# Altium PCB PCB1.PcbDoc
Units mm, origin at the board's own origin, x right, y up, seen from the top; angles counter-clockwise.
Board outline 89.79 x 69.09 mm, 2 copper layers (Top Layer, Bottom Layer); 48 components, 35 nets, 197 pads, 60 vias.
Unrouted connection lines stored in the file: 4.
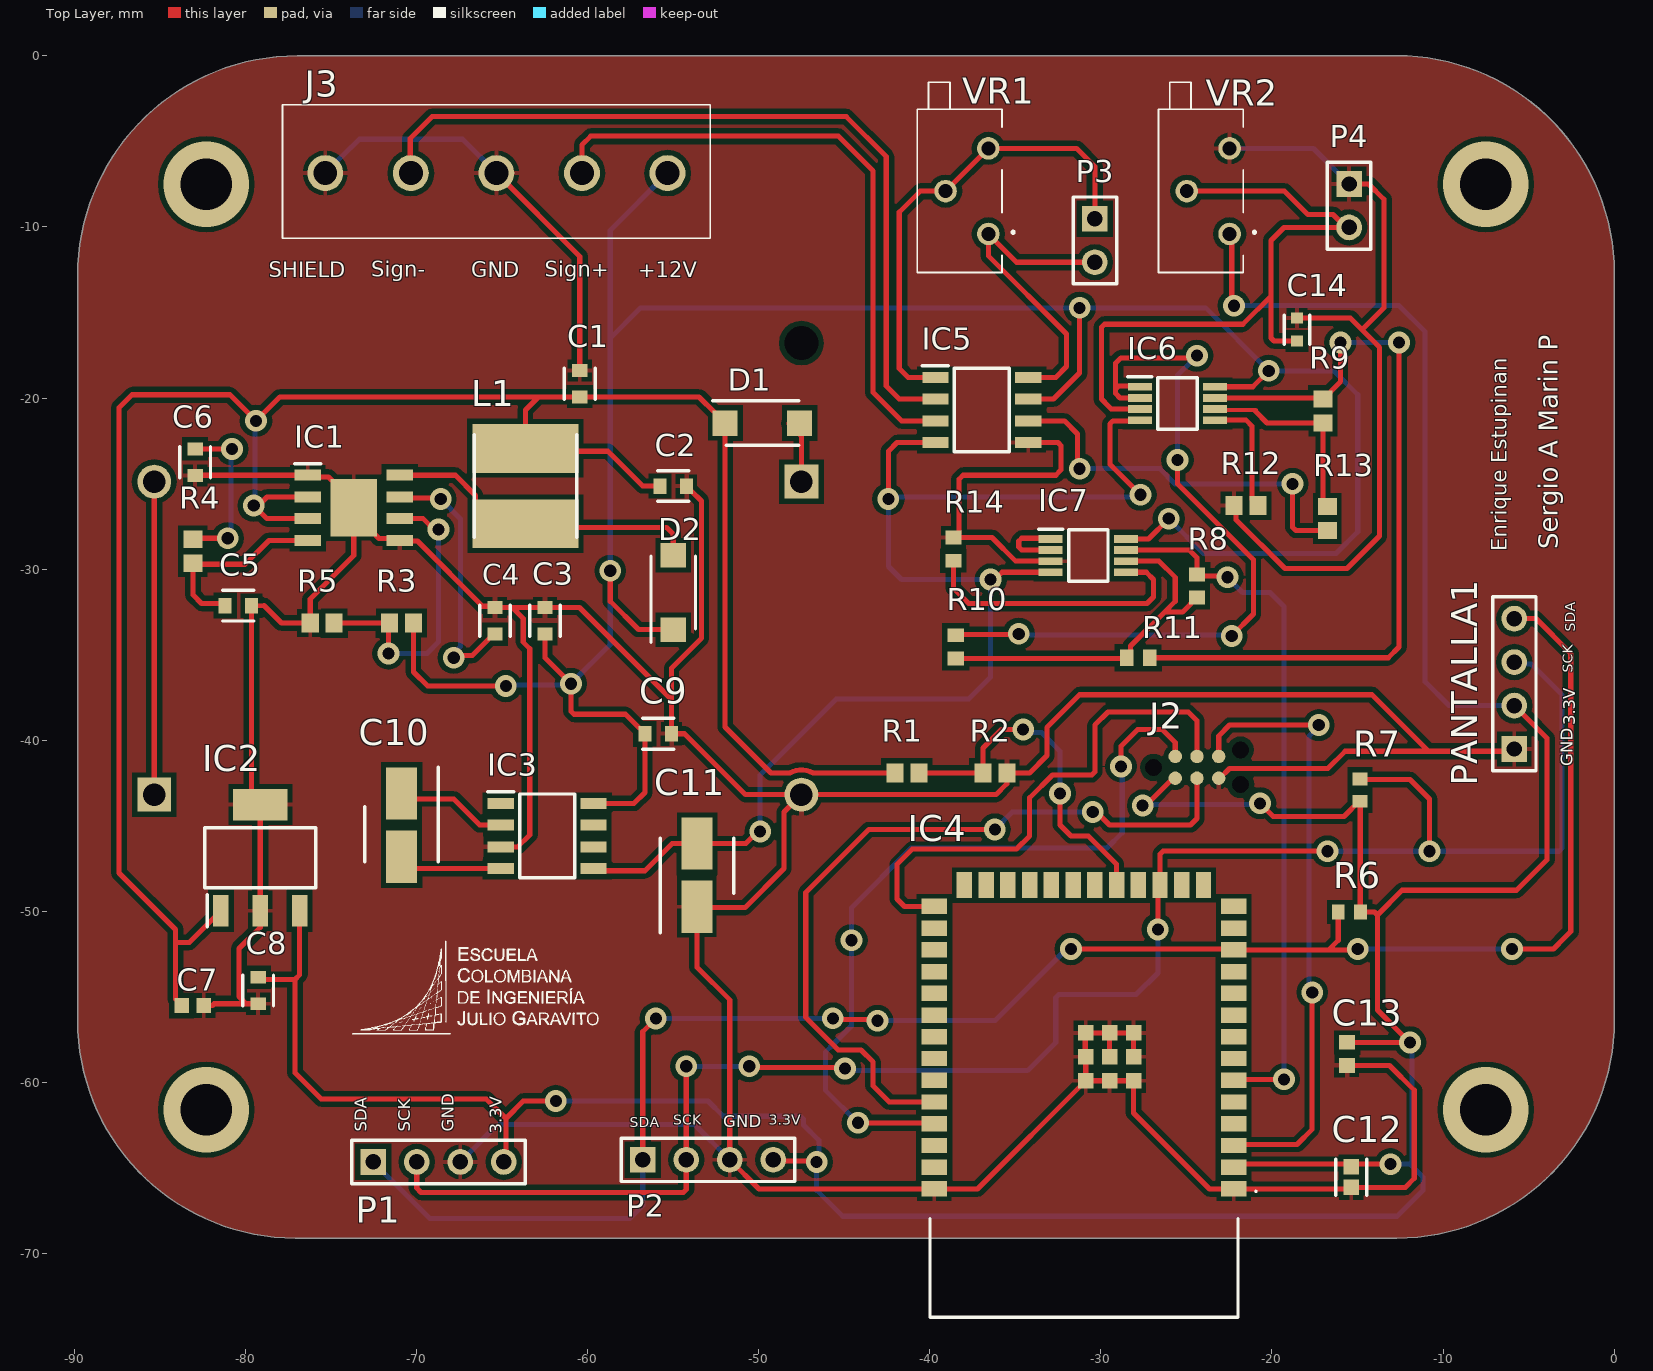
[diagram p0: Top Layer view]
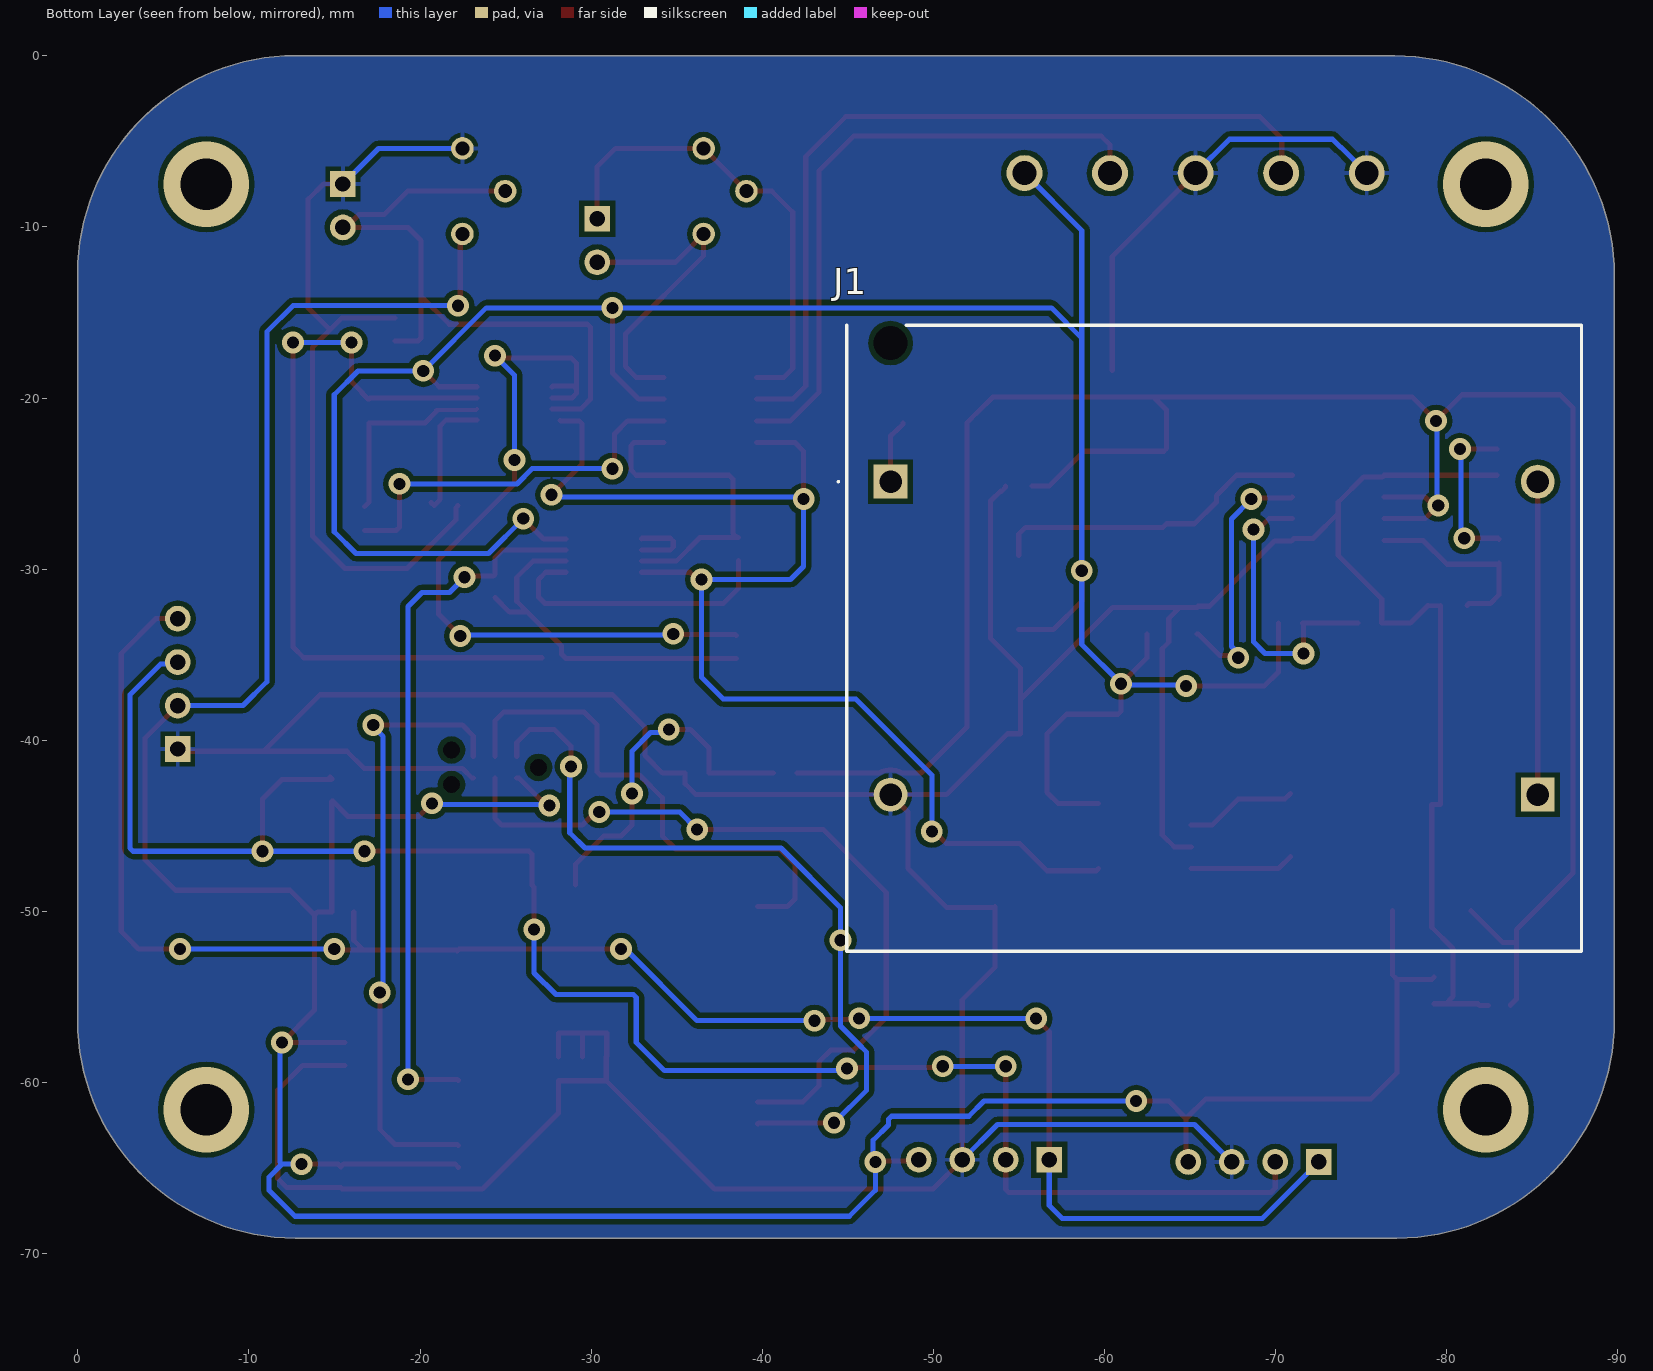
[diagram p1: Bottom Layer view, seen from below]
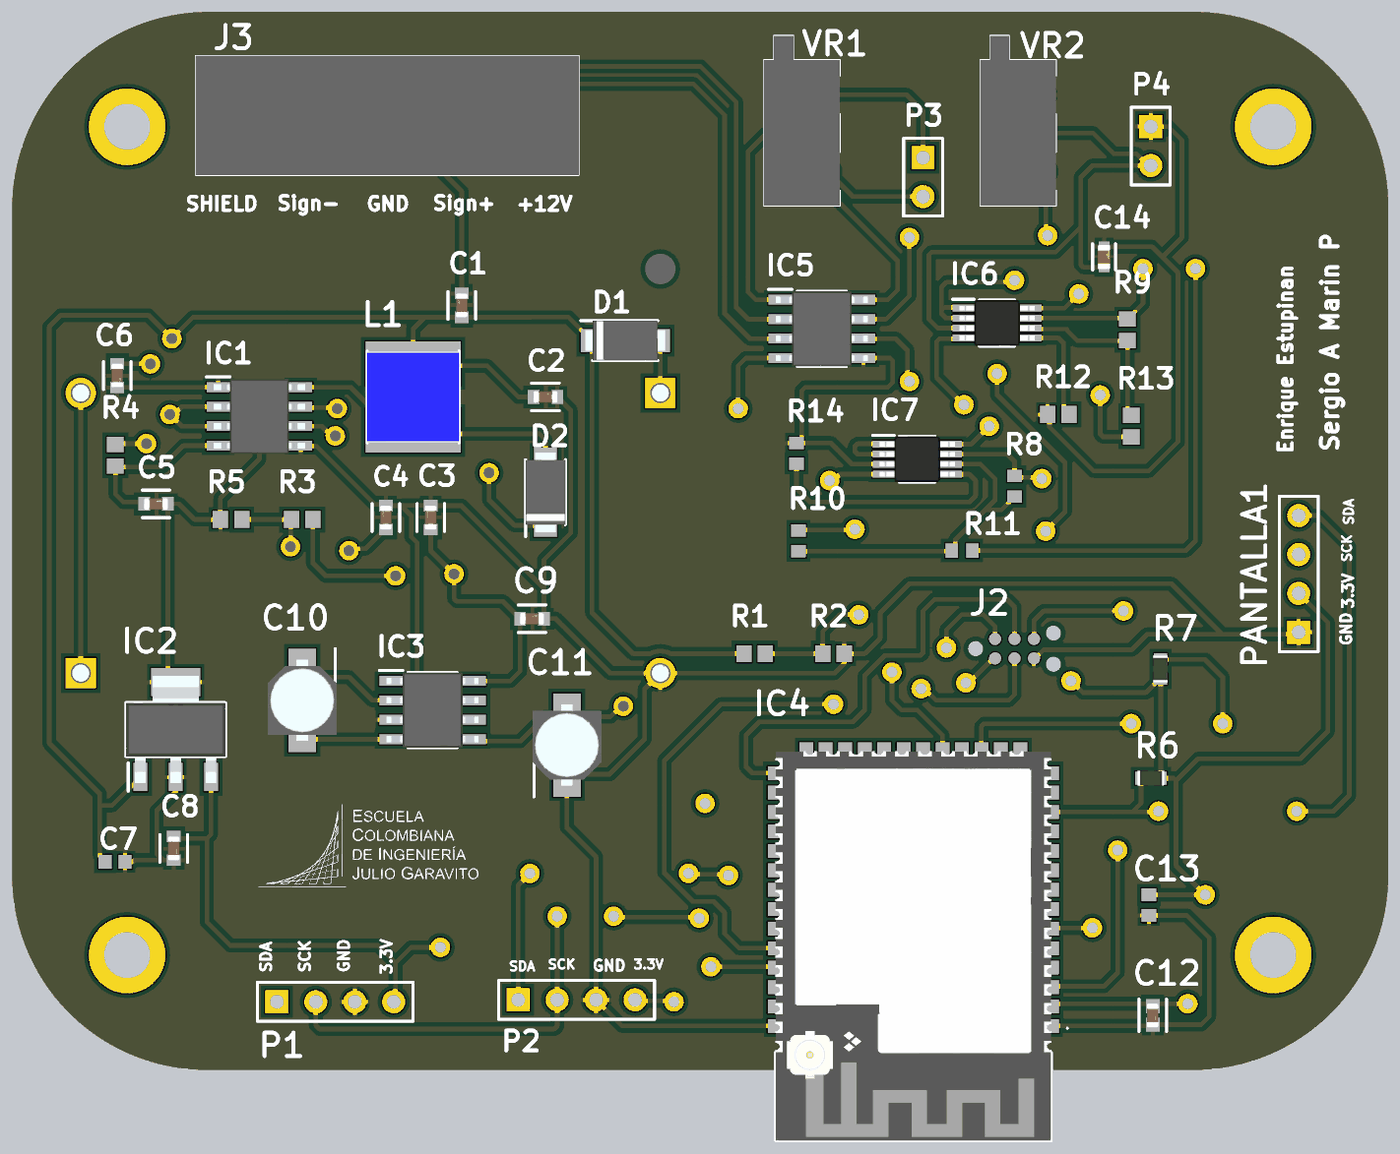
[diagram p2: 3D render of the assembled board from above, using the file's embedded part models]

## Layer stack, top to bottom
Top Solder: solder mask 0.0102, Solder Resist, Dk 3.5
Top Layer: signal copper 0.0356
Dielectric 1: dielectric 0.32, FR-4, Dk 4.8
Bottom Layer: signal copper 0.0356
Bottom Solder: solder mask 0.0102, Solder Resist, Dk 3.5

## Board outline
-89.787,-56.386 ccw(c-77.087,-56.386) -77.087,-69.086 -12.698,-69.086 ccw(c-12.698,-56.386) 0.002,-56.386 0,-56.383 0,-12.7 0.002,-12.698 ccw(c-12.698,-12.698) -12.698,0.002 -12.7,0 -76.948,0 ccw(c-76.948,-12.839) -89.787,-12.839

## Design rules (kind name [scope] priority, off if disabled: settings)
Clearance [All] p1: gap=0.3 ignorepadtopadclearanceinfootprint=FALSE except(0: Arc-Hole Track-Hole SMDPad-Hole THPad-Hole Via-Hole Fill-Hole Poly-Hole Region-Hole Text-Hole)
PolygonConnect [All] p1: connectstyle=Relief reliefconductorwidth=0.254 reliefentries=4 polygonreliefangle="90 Angle" airgapwidth=0.254
RoomDefinition Signal_conditioning [InComponentClass('Signal_conditioning')] p1: confinementstyle=ConfineIn formatcopy=TRUE lockcomponents=FALSE outline -141.222,-113.028 -90.422,-113.028 -90.422,-87.628 -141.222,-87.628
RoomDefinition Power_system [InComponentClass('Power_system')] p2: confinementstyle=ConfineIn formatcopy=TRUE lockcomponents=FALSE outline -141.222,-113.028 -90.422,-113.028 -90.422,-87.628 -141.222,-87.628
RoomDefinition ESP32_SENSORS [InComponentClass('ESP32_SENSORS')] p3: confinementstyle=ConfineIn formatcopy=TRUE lockcomponents=FALSE outline -141.222,-113.028 -90.422,-113.028 -90.422,-87.628 -141.222,-87.628
RoutingVias [All] p1: holewidth=0.711 width=1.27 viastyle="Through Hole" minholewidth=0.711 minwidth=1.27 maxholewidth=0.711 maxwidth=1.27
SolderMaskExpansion [All] p1: expansion=0.102 istentingtop=FALSE
Width [All] p1: maxlimit=0.3 minlimit=0.1 preferedwidth=0.3 minimp=50.000000 maximp=50.000000 favimp=50.000000
30 further rules are at their usual default settings.

## Classes and differential pairs
component class Signal_conditioning: C14 IC5 IC6 IC7 IC9 IC10 J3 P3 P4 R8 R9 R10 R11 R12 R13 R14 VR1 VR2
component class ESP32_SENSORS: C12 C13 IC4 J2 P1 P2 PANTALLA1 R6 R7
component class Power_system: C1 C2 C3 C4 C5 C6 C7 C8 C9 C10 C11 D1 D2 IC1 IC2 IC3 L1 R1 R2 R3 R4 R5

## Components (designator, comment, footprint, x,y, rotation, side; value= is the part's Value field where it differs from the comment)
C1 "10uF" FP-GRM188-0_2-MFG -60.45,-19.162 r90 top
C2 "1uF" FP-GRM188-0_2-MFG -54.989,-25.144 r0 top
C3 "10uF" FP-GRM188-0_2-MFG -62.482,-33.018 r90 top
C4 "10nF" FP-GRM188-0_2-MFG -65.403,-33.018 r90 top
C5 "47pF" FP-GRM188-0_2-MFG -80.402,-32.129 r0 top
C6 "2.2nF" FP-GRM188-0_2-MFG -82.929,-23.747 r270 top
C7 "10uF / 10V" CAPC1608X90X35LL15T15 -83.071,-55.497 r180 top
C8 "22uF" FP-GRM188-0_2-MFG -79.246,-54.621 r270 top
C9 "10uF" FP-GRM188-0_2-MFG -55.865,-39.622 r0 top
C10 "10 uF" CAPAE430X550N -70.864,-44.956 r270 top
C11 "10 uF" CAPAE430X550N -53.592,-47.877 r90 top
C12 "22uF" FP-GRM188-0_2-IPC_C -15.365,-65.53 r270 top
C13 "100nF" CAPC1608X90X35NL10T15 -15.619,-58.331 r90 top
C14 "10 uF" FP-GRM188-0_1-e0_2_0_55-MFG -18.54,-16 r90 top
D1 "SS34ALH" SODFL5226X100N -49.782,-21.461 r0 top
D2 "SS34ALH" SODFL5226X100N -54.989,-31.367 r90 top
IC1 "PAM2421AECADJR" SOIC127P600X150-9N -73.658,-26.414 r0 top
IC2 "AZ1117CH2-3.3TRG1" SOT230P700X180-4N -79.119,-46.861 r90 top
IC3 "TC7662BCOA" SOIC127P600X175-8N -62.355,-45.591 r0 top
IC4 "ESP32-S2-SOLO-N4R2" ESP32S2SOLON4R2 -30.986,-60.958 r180 top
IC5 "INA129UA_2K5" SOIC127P600X175-8N -36.955,-20.699 r0 top
IC6 "LM2904BIDGKR" SOP65P490X110-8N -25.525,-20.318 r0 top
IC7 "LM2904BIDGKR" SOP65P490X110-8N -30.732,-29.208 r0 top
J1 "1055" 1055 -47.496,-24.888 r180 bottom
J2 "TC2030-CTX-NL" TC2030MCPNL10 -24.382,-41.781 r0 top
J3 "TB003-500-P05BE" TB003500P05BE -75.323,-6.856 r0 top
L1 "TYS60456R8M-10" INDPM6060X470N -63.625,-25.144 r270 top
P1 "Header 4" HDR1X4 -72.515,-64.641 r0 top
P2 "Header 4" HDR1X4 -56.767,-64.514 r0 top
P3 "Header 2" HDR1X2 -30.351,-9.523 r270 top
P4 "Header 2" HDR1X2 -15.492,-7.491 r270 top
PANTALLA1 "Header 4" HDR1X4 -5.84,-40.511 r90 top
R1 "40.2K" RESC1608X55X30ML20T20 -41.338,-41.908 r180 top
R2 "51K" RESC1608X55X30ML20T20 -36.193,-41.908 r180 top
R3 "84.5K" RESC1608X55X30ML20T20 -70.864,-33.145 r0 top
R4 "51K" RESC1608X55X30ML20T20 -83.056,-28.954 r270 top
R5 "10K" RESC1608X55X30ML20T20 -75.501,-33.145 r0 top
R6 "10K" RESC1609X55X30LL15T15 -15.477,-50.036 r180 top
R7 "10K" RESC1609X55X30LL15T15 -14.857,-42.909 r90 top
R8 "100 K" RESC1608X55X30NL15T15 -24.382,-30.986 r90 top
R9 "51K" RESC1608X55X30ML20T20 -17.016,-20.761 r90 top
R10 "100K" RESC1608X55X30NL15T15 -38.479,-34.542 r270 top
R11 "100K" RESC1608X55X30NL15T15 -27.811,-35.177 r180 top
R12 "36K" RESC1608X55X30ML20T20 -21.526,-26.287 r0 top
R13 "120K" RESC1608X55X30ML20T20 -16.762,-27.049 r90 top
R14 "33.2K" RESC1608X55X30NL15T15 -38.606,-28.827 r270 top
VR1 "67ZR10KLF" 67ZR10KLF -36.574,-10.412 r270 top
VR2 "67ZR10KLF" 67ZR10KLF -22.477,-10.412 r270 top

## Footprints (in the part's own frame and the unit in brackets; to place one, negate y for a bottom-side part, rotate by r counter-clockwise, add the part's x,y. Pads: shape width x height; smd on the part's side, far side on the other; paste and mask are expansions set on the pad)
67ZR10KLF [mm]
  round 1.316 hole 0.81: 1(0,0) 2(-2.5,-2.5) 3(-5,0)
  silkscreen extent -8.86,-4.15 2.25,1.5, body extent -8.86,-4.15 2.25,0.8, height 10.5
1055 [mm]
  rect 1.98x1.98 hole 1.32: 1(0,0) 3(37.82,-18.29)
  round 1.98 hole 1.32: 2(0,-18.29) 4(37.82,0)
  round 0.99 hole 1.98 unplated: MH1(0,8.1)
  silkscreen extent -3.1,-27.44 40.37,9.14, body extent -2.56,-27.44 40.38,9.15, height 15.58
CAPAE430X550N [mm]
  rect 3.05x1.8 smd: 1(-1.85,0) 2(1.85,0)
  silkscreen extent -3.37,-2.15 2.15,2.15, body extent -2.65,-2.25 2.65,2.25, height 5.5
CAPC1608X90X35LL15T15 [mm] "Chip Capacitor, 2-Leads, Body 1.60x0.81mm, IPC High Density"
  rect 0.85x0.9 smd: 1(-0.65,0) 2(0.65,0)
  body extent -0.88,-0.48 0.87,0.48, height 0.9
CAPC1608X90X35NL10T15 [mm] "Chip Capacitor, 2-Leads, Body 1.60x0.80mm, IPC Medium Density"
  rect 0.85x0.95 smd: 1(-0.675,0) 2(0.675,0)
  body extent -0.85,-0.45 0.85,0.45, height 0.9
ESP32S2SOLON4R2 [mm]
  rect 1.5x0.9 smd: 1(-8.75,5.26) 2(-8.75,3.99) 3(-8.75,2.72) 4(-8.75,1.45) 5(-8.75,0.18) 6(-8.75,-1.09) 7(-8.75,-2.36) 8(-8.75,-3.63) 9(-8.75,-4.9) 10(-8.75,-6.17) 11(-8.75,-7.44) 12(-8.75,-8.71) 13(-8.75,-9.98) 14(-8.75,-11.25) 27(8.75,-11.25) 28(8.75,-9.98) 29(8.75,-8.71) 30(8.75,-7.44) 31(8.75,-6.17) 32(8.75,-4.9) 33(8.75,-3.63) 34(8.75,-2.36) 35(8.75,-1.09) 36(8.75,0.18) 37(8.75,1.45) 38(8.75,2.72) 39(8.75,3.99) 40(8.75,5.26)
  rect 0.9x1.5 smd: 15(-6.985,-12.5) 16(-5.715,-12.5) 17(-4.445,-12.5) 18(-3.175,-12.5) 19(-1.905,-12.5) 20(-0.635,-12.5) 21(0.635,-12.5) 22(1.905,-12.5) 23(3.175,-12.5) 24(4.445,-12.5) 25(5.715,-12.5) 26(6.985,-12.5)
  rect 0.9x0.9 smd: 41(-1.5,-2.46) 42(-1.5,-1.06) 43(-2.9,-1.06) 44(-2.9,-2.46) 45(-2.9,-3.86) 46(-1.5,-3.86) 47(-0.1,-3.86) 48(-0.1,-2.46) 49(-0.1,-1.06)
  silkscreen extent -10.1,5.35 9,12.75, body extent -9,-12.68 8.99,12.74, height 2.65
FP-GRM188-0_1-e0_2_0_55-MFG [mm]
  rect 0.65x0.7 smd paste+0 mask+0: 1(-0.675,0) 2(0.675,0)
  silkscreen extent -0.85,-0.75 0.85,0.75, body extent -1.1,-0.55 1.1,0.55, height 0.25
FP-GRM188-0_2-IPC_C [mm]
  rect 0.905x0.906 smd paste+0 mask+0: 1(-0.601,0) 2(0.601,0)
  silkscreen extent -1.05,-0.9 1.05,0.9, body extent -1.15,-0.6 1.15,0.6, height 0.25
FP-GRM188-0_2-MFG [mm]
  rect 0.75x0.9 smd paste+0 mask+0: 1(-0.775,0) 2(0.775,0)
  silkscreen extent -0.9,-0.9 0.9,0.9, body extent -1.25,-0.6 1.25,0.6, height 0.25
HDR1X2 [mm] "Connector; Header; 2 Position"
  rect 1.5x1.5 hole 0.9: 1(0,0)
  round 1.5 hole 0.9: 2(2.54,0)
  silkscreen extent -1.27,-1.27 3.81,1.27
HDR1X4 [mm] "Connector; Header; 4 Position"
  rect 1.5x1.5 hole 0.9: 1(0,0)
  round 1.5 hole 0.9: 2(2.54,0) 3(5.08,0) 4(7.62,0)
  silkscreen extent -1.27,-1.27 8.89,1.27
INDPM6060X470N [mm]
  rect 2.85x6.2 smd: 1(-2.2,0) 2(2.2,0)
  silkscreen extent -3,-3 3,3, body extent -3,-3 3,3, height 4.7
RESC1608X55X30ML20T20 [mm] "Chip Resistor, 2-Leads, Body 1.60x0.80mm, IPC Low Density"
  rect 1x1.1 smd: 1(-0.7,0) 2(0.7,0)
  body extent -0.9,-0.5 0.9,0.5, height 0.55
RESC1608X55X30NL15T15 [mm] "Chip Resistor, 2-Leads, Body 1.60x0.80mm, IPC Medium Density"
  rect 0.8x0.95 smd: 1(-0.675,0) 2(0.675,0)
  body extent -0.87,-0.48 0.87,0.48, height 0.55
RESC1609X55X30LL15T15 [mm] "Chip Resistor, 2-Leads, Body 1.75x0.95mm, IPC High Density"
  rect 0.75x0.85 smd: 1(-0.65,0) 2(0.65,0)
  body extent -0.87,-0.48 0.87,0.48, height 0.55
SODFL5226X100N [mm]
  rect 1.45x1.49 smd: 1(-2.175,0) 2(2.175,0)
  silkscreen extent -2.9,-1.3 2.12,1.3, body extent -2.6,-1.3 2.6,1.3, height 1
SOIC127P600X150-9N [mm]
  rect 1.525x0.65 smd: 1(-2.688,1.905) 2(-2.688,0.635) 3(-2.688,-0.635) 4(-2.688,-1.905) 5(2.688,-1.905) 6(2.688,-0.635) 7(2.688,0.635) 8(2.688,1.905)
  rect 2.71x3.35 smd: 9(0,0)
  silkscreen extent -3.45,2.58 -1.93,2.58, body extent -3,-2.45 3,2.45, height 1.5
SOIC127P600X175-8N [mm]
  rect 1.525x0.65 smd: 1(-2.712,1.905) 2(-2.712,0.635) 3(-2.712,-0.635) 4(-2.712,-1.905) 5(2.712,-1.905) 6(2.712,-0.635) 7(2.712,0.635) 8(2.712,1.905)
  silkscreen extent -3.47,-2.45 1.6,2.58, body extent -3,-2.45 3,2.45, height 1.75
SOP65P490X110-8N [mm]
  rect 1.4x0.45 smd: 1(-2.2,0.975) 2(-2.2,0.325) 3(-2.2,-0.325) 4(-2.2,-0.975) 5(2.2,-0.975) 6(2.2,-0.325) 7(2.2,0.325) 8(2.2,0.975)
  silkscreen extent -2.9,-1.5 1.15,1.55, body extent -2.45,-1.5 2.45,1.5, height 1.1
SOT230P700X180-4N [mm]
  rect 1.85x0.9 smd: 1(-3.1,2.3) 2(-3.1,0) 3(-3.1,-2.3)
  rect 1.85x3.2 smd: 4(3.1,0)
  silkscreen extent -4.02,-3.25 1.75,3.25, body extent -3.5,-3.25 3.5,3.25, height 1.8
TB003500P05BE [mm]
  round 2.1 hole 1.4: 1(0,0) 2(5,0) 3(10,0) 4(15,0) 5(20,0)
  silkscreen extent -2.5,-3.8 22.5,4, body extent -2.5,-3.8 22.5,4, height 10.8
TC2030MCPNL10 [mm]
  round 0.787 smd: 1(-1.27,-0.434) 2(-1.27,0.836) 3(0,-0.434) 4(0,0.836) 5(1.27,-0.434) 6(1.27,0.836)
  round 0.495 hole 0.991 unplated: 7(-2.54,0.201) 8(2.54,1.217) 9(2.54,-0.815)

## Part data
C1 C2 C3 C4 C5 C6 C9: library part CMP-2006-02788-2, "Chip Multilayer Ceramic Capacitors for General Purpose, 0603, 22uF, X5R, 15%, 20%, 4V", Capacitance=22uF, Case Code (Imperial)=0603, Case Code (Metric)=1608, Dielectric=X5R, Max Operating Temperature=85°C, Min Operating Temperature=-55°C, Package Quantity=4000, Tolerance=20%, Voltage=4V, Case/Package=0603, Depth=0.8mm, Height=0.8mm, Lead Free="Lead Free", Length=1.6mm, Material=Ceramic, Mount="Surface Mount", Packaging="Tape and Reel", Radiation Hardening=No, REACH SVHC="No SVHC", Termination=SMD/SMT, Thickness=0.035inch, Voltage Rating=4V, Voltage Rating (DC)=4V, Width=0.8mm
C7: library part CMP-2006-02241-1, Manufacturer=Kemet, Part Number=C0603C105K9PACTU
C8: library part CMP-2006-02788-2, "Chip Multilayer Ceramic Capacitors for General Purpose, 0603, 22uF, X5R, 15%, 20%, 4V", Case Code (Imperial)=0603, Case Code (Metric)=1608, Dielectric=X5R, Max Operating Temperature=85°C, Min Operating Temperature=-55°C, Package Quantity=4000, Tolerance=20%, Voltage=4V, Capacitance=22uF, Case/Package=0603, Depth=0.8mm, Height=0.8mm, Lead Free="Lead Free", Length=1.6mm, Material=Ceramic, Mount="Surface Mount", Packaging="Tape and Reel", Radiation Hardening=No, REACH SVHC="No SVHC", Termination=SMD/SMT, Thickness=0.035inch, Voltage Rating=4V, Voltage Rating (DC)=4V, Width=0.8mm
C10 C11: library part 865080340001, "Capacitor Polarised", Manufacturer_Name="Wurth Elektronik", Mouser Part Number=710-865080340001, Datasheet Link=https://componentsearchengine.com/Datasheets/1/865080340001.pdf, Height=5.5mm, Manufacturer_Part_Number=865080340001, Mouser Price/Stock=https://www.mouser.co.uk/ProductDetail/Wurth-Elektronik/865080340001?qs=0KOYDY2FL2%252BaqRFD837lAw%3D%3D
C12: library part CMP-2006-02545-2, "Chip Multilayer Ceramic Capacitors for General Purpose, 0603, 4.7uF, X5R, 15%, 10%, 35V", Capacitance=4.7uF, Case Code (Imperial)=0603, Case Code (Metric)=1608, Dielectric=X5R, Max Operating Temperature=85°C, Min Operating Temperature=-55°C, Package Quantity=4000, Resistor Type=Ceramic, Tolerance=10%, Voltage=35V, Case/Package=0603, Depth=0.8mm, Height=0.8mm, Lead Free="Lead Free", Length=1.6mm, Material=Ceramic, Mount="Surface Mount", Packaging="Tape and Reel", REACH SVHC="No SVHC", Termination=SMD/SMT, Thickness=0.031inch, Voltage Rating=35V, Voltage Rating (DC)=35V, Weight=0.000222oz, Width=0.8mm
C13: library part CMP-2006-02777-1, Manufacturer=Murata, Part Number=GRM188F51E104ZA01D
C14: library part CMP-2006-02759-2, "Chip Multilayer Ceramic Capacitors for General Purpose, 0603, 10uF, X6S, 22%, 20%, 2.5V", Capacitance=10uF, Case Code (Imperial)=0603, Case Code (Metric)=1608, Dielectric=X6S, Max Operating Temperature=105°C, Min Operating Temperature=-55°C, Package Quantity=4000, Tolerance=20%, Voltage=2.5V, Case/Package=0603, Depth=0.8mm, Height=0.8mm, Length=1.6mm, Mount="Surface Mount", Packaging="Tape and Reel", Radiation Hardening=No, REACH SVHC="No SVHC", Termination=SMD/SMT, Thickness=0.035inch, Voltage Rating=2.5V, Voltage Rating (DC)=2.5V, Width=0.031inch
D1 D2: "Schottky Diode", Manufacturer_Name="Taiwan Semiconductor", Mouser Part Number=821-SS34ALH, Arrow Part Number=SS34ALH, Arrow Price/Stock=https://www.arrow.com/en/products/ss34alh/taiwan-semiconductor?region=nac, Datasheet Link=https://services.ts.com.tw/storage/resources/datasheet/SS34ALH%20SERIES_B2103.pdf, Height=1mm, Manufacturer_Part_Number=SS34ALH, Mouser Price/Stock=https://www.mouser.co.uk/ProductDetail/Taiwan-Semiconductor/SS34ALH?qs=A6eO%252BMLsxmQip%2FrgNup6RA%3D%3D
IC1: "Integrated Circuit", Manufacturer_Name="Diodes Incorporated", Mouser Part Number=621-PAM2421AECADJR, Arrow Part Number=PAM2421AECADJR, Arrow Price/Stock=https://www.arrow.com/en/products/pam2421aecadjr/diodes-incorporated?region=nac, Datasheet Link=https://www.diodes.com/assets/Datasheets/products_inactive_data/PAM2421_22_23.pdf, Height=1.5mm, Manufacturer_Part_Number=PAM2421AECADJR, Mouser Price/Stock=https://www.mouser.co.uk/ProductDetail/Diodes-Incorporated/PAM2421AECADJR?qs=pYVYkI7xuRVOhRU6vAk7Ag%3D%3D
IC2: "Integrated Circuit", Manufacturer_Name="Diodes Incorporated", Mouser Part Number=621-AZ1117CH2-33TRG1, Arrow Part Number=AZ1117CH2-3.3TRG1, Arrow Price/Stock=https://www.arrow.com/en/products/az1117ch2-3.3trg1/diodes-incorporated?region=nac, Datasheet Link=https://www.arrow.com/en/products/az1117ch2-3.3trg1/diodes-incorporated, Height=1.8mm, Manufacturer_Part_Number=AZ1117CH2-3.3TRG1, Mouser Price/Stock=https://www.mouser.co.uk/ProductDetail/Diodes-Incorporated/AZ1117CH2-3.3TRG1?qs=lQAVKuKFhkLc7jCxso2G3w%3D%3D
IC3: "Integrated Circuit", Manufacturer_Name=Microchip, Mouser Part Number=579-TC7662BCOA, Arrow Part Number=TC7662BCOA, Arrow Price/Stock=https://www.arrow.com/en/products/tc7662bcoa/microchip-technology?region=nac, Datasheet Link=https://datasheet.datasheetarchive.com/originals/distributors/Datasheets-19/DSA-360076.pdf, Height=1.75mm, Manufacturer_Part_Number=TC7662BCOA, Mouser Price/Stock=https://www.mouser.co.uk/ProductDetail/Microchip-Technology/TC7662BCOA?qs=MvcPkWSywoxVMnnd8pEw8w%3D%3D
IC4: "Integrated Circuit", Manufacturer_Name="Espressif Systems", Mouser Part Number=356-ESP32-S2SOLON4R2, Datasheet Link=https://www.espressif.com/sites/default/files/documentation/esp32-s2-solo_esp32-s2-solo-u_datasheet_en.pdf, Height=3.25mm, Manufacturer_Part_Number=ESP32-S2-SOLO-N4R2, Mouser Price/Stock=https://www.mouser.co.uk/ProductDetail/Espressif-Systems/ESP32-S2-SOLO-N4R2?qs=pBJMDPsKWf0j4qPDQHWJuA%3D%3D
IC5: "Integrated Circuit", Arrow Part Number=INA129UA/2K5, Manufacturer_Name="Texas Instruments", Mouser Part Number=595-INA129UA/2K5, Arrow Price/Stock=https://www.arrow.com/en/products/ina129ua2k5/texas-instruments?region=nac, Datasheet Link=http://www.ti.com/lit/gpn/INA129, Height=1.75mm, Manufacturer_Part_Number=INA129UA/2K5, Mouser Price/Stock=https://www.mouser.co.uk/ProductDetail/Texas-Instruments/INA129UA-2K5?qs=VBduBm9rCJTU2wXJjO5FZQ%3D%3D
IC6 IC7: "Integrated Circuit", Manufacturer_Name="Texas Instruments", Mouser Part Number=595-LM2904BIDGKR, Arrow Part Number=LM2904BIDGKR, Arrow Price/Stock=https://www.arrow.com/en/products/lm2904bidgkr/texas-instruments?region=nac, Datasheet Link=https://pdf1.alldatasheet.com/ce52a4c4-aa79-4bf9-a931-b119e42401bc, Height=1.1mm, Manufacturer_Part_Number=LM2904BIDGKR, Mouser Price/Stock=https://www.mouser.co.uk/ProductDetail/Texas-Instruments/LM2904BIDGKR?qs=DRkmTr78QASPPFtqyAg2uA%3D%3D
J1: "Connector", Manufacturer_Name="Keystone Electronics", Mouser Part Number=534-1055, Datasheet Link=https://www.keyelco.com/product-pdf.cfm?p=14065, Height=15.48mm, Manufacturer_Part_Number=1055, Mouser Price/Stock=https://www.mouser.co.uk/ProductDetail/Keystone-Electronics/1055?qs=OkugU0Onrk3ye42txSrmZg%3D%3D
J2: "Connector", Manufacturer="Tag Connect", Datasheet Link=http://www.tag-connect.com/Materials/TC2030-CTX.pdf, Height=18mm, Manufacturer Product Number=TC2030-CTX-NL
J3: "Connector", Manufacturer_Name="CUI Devices", Mouser Part Number=490-TB003-500-P05BE, Arrow Part Number=TB003-500-P05BE, Arrow Price/Stock=https://www.arrow.com/en/products/tb003-500-p05be/cui-devices?region=nac, Datasheet Link=https://www.cui.com/product/resource/tb003-500.pdf, Height=10.7mm, Manufacturer_Part_Number=TB003-500-P05BE, Mouser Price/Stock=https://www.mouser.co.uk/ProductDetail/CUI-Devices/TB003-500-P05BE?qs=vLWxofP3U2xXm4XKOMROaw%3D%3D
L1: "Inductor", Manufacturer_Name="Laird Performance Materials", Mouser Part Number=875-TYS60456R8M-10, Datasheet Link=https://componentsearchengine.com/Datasheets/1/TYS60456R8M-10.pdf, Height=4.7mm, Manufacturer_Part_Number=TYS60456R8M-10, Mouser Price/Stock=https://www.mouser.co.uk/ProductDetail/Laird-Performance-Materials/TYS60456R8M-10?qs=HVbQlW5zcXUG%252BgroF%2F21Tw%3D%3D
P1 P2 PANTALLA1: "Header, 4-Pin", LatestRevisionDate=17-Jul-2002, LatestRevisionNote="Re-released for DXP Platform.", Publisher="Altium Limited"
P3 P4: "Header, 2-Pin", LatestRevisionDate=17-Jul-2002, LatestRevisionNote="Re-released for DXP Platform.", Publisher="Altium Limited"
R1 R2 R3 R4 R5 R9 R12 R13: library part CMP-2000-00041-1, Manufacturer=Panasonic, Part Number=ERA3AEB333V
R6 R7: library part CMP-1012-00623-3, "Chip Resistor, 10 KOhm, +/- 1%, 0.1 W, -55 to 155 degC, 0603 (1608 Metric), RoHS, Tape and Reel", Case Code (Imperial)=0603, Case Code (Metric)=1608, Manufacturer=Panasonic, Max Operating Temperature=155degC, Max Power Dissipation=100mW, Min Operating Temperature=-55degC, Package Description="2-Pin Surface Mount Device, Body 1.6 x 0.85 mm", Package Quantity=1, Package Reference=603, Resistance=10KOhm, Temperature Coefficient=100ppm\/degreesC, Tolerance=1%, Voltage Rating=75V, Case\/Package=0603, Composition=ThickFilm, Contact Plating=Tin, Datasheet URL=https://industrial.panasonic.com/cdbs/www-data/pdf/RDA0000/AOA0000C304.pdf, Datasheet Version=02/2017, Depth=0.8mm, Height=0.45mm, Lead Free=LeadFree, Length=1.6mm, Manufacturer URL=http://www.panasonic.com/, Military Standard=Not, Mount=SurfaceMount, Mounting Technology=SurfaceMount, Number of Pins=2, Number of Terminations=2, Packaging=TapeandReel, Power Rating=100mW, Radiation Hardening=No, REACH SVHC=NoSVHC, RoHSCompliant=true, Termination=SMD/SMT, Voltage Rating (DC)=75V, Width=0.031inch
R8 R10 R11 R14: library part CMP-2000-00705-1, Manufacturer=Panasonic, Part Number=ERJ-3GEYJ104V
VR1 VR2: "Variable Resistor", Manufacturer_Name="TT Electronics", Mouser Part Number=858-67ZR10KLF, Datasheet Link=https://componentsearchengine.com/Datasheets/1/67ZR10KLF.pdf, Height=10.4mm, Manufacturer_Part_Number=67ZR10KLF, Mouser Price/Stock=https://www.mouser.com/Search/Refine.aspx?Keyword=858-67ZR10KLF

## Via types
v1: diameter 1.27, hole 0.711, Top Layer to Bottom Layer, 56 vias
v2: diameter 5, hole 3, Top Layer to Bottom Layer, 4 vias

## Nets (pads, with @x,y where several pads share a name; then routed paths per layer and width w, separated by ;. In a path a pad name is that pad's centre, name@x,y a point inside that pad or via, vN(x,y) a via of type N, cw(c..) or ccw(c..) an arc to the next point about the centre after c; other vN are vias at no path point)
+3.3V: C8.1 C12.1 C13.2 IC2.3 IC4.2 J2.1 P1.4 P2.4 PANTALLA1.2 R6.1 R7.1 VR2.1 | length 208.3
  Top Layer w0.3: C8.1 -79.119,-53.973 -77.087,-53.973 ; IC2.3 -76.819,-53.705 -77.087,-53.973 ; P1.4 -64.768,-64.514 -64.768,-62.101 ; v1(-61.847,-61.085) -63.752,-61.085 -64.768,-62.101 ; P2.4 -49.083,-64.577 -46.67,-64.577 v1(-46.607,-64.641) ; v1(-27.557,-43.813) -27.381,-43.813 -25.783,-42.215 J2.1 ; VR2.1 -22.35,-10.539 -22.35,-14.476 v1(-22.223,-14.603) ; IC4.2 -22.056,-64.768 -15.526,-64.768 C12.1 -15.203,-64.768 v1(-13.079,-64.768) ; v1(-20.699,-43.686) -20.688,-43.686 -19.926,-44.448 -15.796,-44.448 -14.907,-43.559 R7.1 -14.842,-43.574 -14.842,-50.021 R6.1 -14.016,-50.036 -13.841,-50.211 ; C13.2 v1@-11.951,-57.656 ; v1(-11.936,-57.656) v1@-11.951,-57.656 ; PANTALLA1.2 -3.935,-39.876 -3.935,-46.988 -5.713,-48.766 -12.395,-48.766 -13.841,-50.211 ; -77.087,-53.973 -77.087,-59.434 -75.563,-60.958 -65.911,-60.958 -64.768,-62.101 ; -13.841,-50.211 -13.841,-55.766 v1@-11.951,-57.656
  Bottom Layer w0.3: v1(-61.847,-61.085) -52.957,-61.085 -52.068,-61.974 -47.544,-61.974 -47.369,-62.149 -47.369,-62.482 -46.48,-63.371 -46.48,-64.514 v1(-46.607,-64.641) -46.607,-66.292 -45.083,-67.816 -12.698,-67.816 -11.174,-66.292 -11.174,-65.53 -11.936,-64.768 ; v1(-27.557,-43.813) -27.493,-43.749 -20.762,-43.749 v1(-20.699,-43.686) ; v1(-22.223,-14.603) -12.575,-14.603 -11.049,-16.129 -11.049,-36.576 -9.654,-37.971 PANTALLA1.2 ; v1(-13.079,-64.768) -11.936,-64.768 ; v1(-11.936,-57.656) -11.809,-57.783 -11.809,-64.641 -11.936,-64.768
+12V: C3.1 C9.1 D2.1 IC3.8 IC5.7 IC6.8 IC7.8 J3.5 R3.2 | length 148.4
  Top Layer w0.3: R3.2 -70.164,-36.004 -69.34,-36.828 v1(-64.768,-36.828) ; C3.1 -62.482,-35.177 v1(-60.958,-36.701) -60.958,-38.305 -60.782,-38.481 -57.78,-38.481 C9.1 -56.64,-43.051 -57.275,-43.686 IC3.8 ; v1(-58.672,-30.097) -58.672,-31.879 -57.023,-33.528 D2.1@-54.991,-33.528 ; IC5.7 -32.764,-20.064 -31.24,-18.54 v1(-31.24,-14.73) ; IC7.8 -27.217,-28.233 v1(-26.033,-27.049) ; IC6.8 -21.121,-19.343 v1(-20.191,-18.413)
  Bottom Layer w0.3: v1(-64.768,-36.828) -64.704,-36.764 -61.021,-36.764 v1(-60.958,-36.701) -60.958,-36.688 -58.672,-34.402 v1(-58.672,-30.097) -58.672,-16.508 ; J3.5 -58.672,-10.205 -58.672,-16.508 ; v1(-26.033,-27.049) -24.001,-29.081 -16.254,-29.081 -14.984,-27.811 -14.984,-19.81 -16.381,-18.413 v1(-20.191,-18.413) -23.874,-14.73 v1(-31.24,-14.73) -56.894,-14.73 -58.672,-16.508
+V_BAT: C1.1 C2.1 C7.2 D1.1 IC1.2 IC1.3 IC2.1 L1.1 R1.2 | length 130.2
  Top Layer w0.3: C7.2 -83.721,-55.472 -84.072,-55.121 -84.072,-51.814 ; IC2.1 -83.272,-51.814 -84.072,-51.814 ; v1(-79.5,-26.287) v1@-79.489,-26.287 ; IC1.3 -78.727,-27.049 v1@-79.489,-26.287 ; IC1.2 -78.729,-25.779 -79.237,-26.287 v1@-79.489,-26.287 ; C2.1 -56.767,-25.144 -58.799,-23.112 -63.457,-23.112 L1.1 -63.625,-20.699 -62.863,-19.937 ; R1.2 -46.817,-41.908 ccw(c-47.496,-43.178) -48.174,-41.908 -49.274,-41.908 -51.957,-39.225 -51.957,-21.441 -52.532,-20.866 -52.552,-20.866 -53.483,-19.934 -55.918,-19.934 -55.921,-19.937 C1.1 -62.863,-19.937 ; -84.072,-51.814 -84.072,-51.052 -87.374,-47.75 -87.374,-20.572 -86.612,-19.81 -80.897,-19.81 v1(-79.373,-21.334) -77.976,-19.937 -62.863,-19.937
  Bottom Layer w0.3: v1(-79.5,-26.287) -79.436,-26.223 -79.436,-21.397 v1(-79.373,-21.334)
-12V: C11.2 IC3.5 IC5.4 IC6.4 IC7.4 | length 76.3
  Top Layer w0.3: IC3.5 -59.516,-47.623 -56.64,-47.623 -55.044,-46.027 C11.2 -50.753,-46.027 -50.063,-45.337 v1(-49.909,-45.337) ; v1(-42.416,-25.906) -42.416,-23.112 -41.908,-22.604 IC5.4 ; v1(-36.447,-30.605) -36.184,-30.605 -35.762,-30.183 IC7.4 ; IC6.4@-28.192,-21.318 -28.208,-21.334 -29.286,-21.334 -29.462,-21.509 -29.462,-23.874 v1(-27.684,-25.652)
  Bottom Layer w0.3: v1(-49.909,-45.337) -49.909,-42.035 -45.464,-37.59 -37.717,-37.59 -36.447,-36.32 v1(-36.447,-30.605) -41.654,-30.605 -42.416,-29.843 v1(-42.416,-25.906) -42.289,-25.779 -27.811,-25.779 v1(-27.684,-25.652)
BattMonitor: IC4.19 R1.1 R2.2 | length 20.5
  Top Layer w0.3: R1.1 R2.2 -36.893,-40.449 -35.812,-39.368 v1(-34.542,-39.368) ; v1(-32.383,-43.109) -32.383,-44.947 -31.739,-45.591 -30.732,-45.591 -29.081,-47.242 IC4.19
  Bottom Layer w0.3: v1(-34.542,-39.368) -34.356,-39.553 -33.467,-39.553 -32.383,-40.638 v1(-32.383,-43.109)
Celda: IC5.6 R13.1 | length 22.7
  Top Layer w0.3: IC5.6 -32.129,-21.334 -31.367,-22.096 -31.367,-24.001 v1(-31.24,-24.128) ; v1(-18.794,-25.017) -18.794,-27.557 -18.602,-27.749 R13.1
  Bottom Layer w0.3: v1(-31.24,-24.128) -26.551,-24.128 -25.662,-25.017 v1(-18.794,-25.017)
EN: IC4.3 J2.6 | length 36.2
  Top Layer w0.3: J2.6 -23.112,-39.749 -22.477,-39.114 v1(-17.27,-39.114) ; IC4.3 -22.183,-63.625 -18.54,-63.625 -17.651,-62.736 v1(-17.651,-54.735)
  Bottom Layer w0.3: v1(-17.651,-54.735) -17.651,-54.472 -17.847,-54.276 -17.847,-39.774 -17.27,-39.197 v1(-17.27,-39.114)
GND: C1.2 C2.2 C3.2 C4.2 C5.2 C6.2 C7.1 C8.2 C9.2 C11.1 C12.2 C13.1 C14.2 IC1.1 IC1.5 IC1.9 IC2.2 IC2.4 IC3.3 IC4.1 IC4.40 IC4.41 IC4.42 IC4.43 IC4.44 IC4.45 IC4.46 IC4.47 IC4.48 IC4.49 IC5.5 IC7.3 J1.2 J2.5 J3.1 J3.3 P1.3 P2.3 P4.1 PANTALLA1.1 R2.1 R5.1 R12.1 R14.1 VR2.3 | length 371.2
  Top Layer w0.3: C6.2 -82.929,-24.509 IC1.1 -76.236,-24.618 -75.133,-24.618 -73.658,-26.094 IC1.9 IC1.9@-73.658,-26.734 ; C7.1 -81.913,-55.497 -81.812,-55.396 -79.944,-55.396 ; C5.2 -79.627,-43.761 IC2.4 IC2.2 -79.119,-50.925 -80.363,-52.169 -80.363,-54.977 -79.944,-55.396 ; C8.2 -79.944,-55.396 ; -78.198,-32.827 -77.88,-33.145 R5.1 -76.201,-31.751 -73.658,-29.208 IC1.9@-73.658,-26.734 ; J3.3 -60.45,-11.729 C1.2 ; IC3.3 -64.069,-46.226 -63.371,-45.527 -63.371,-34.648 -63.752,-34.267 -63.752,-32.878 -64.387,-32.243 C4.2 -65.479,-32.166 -66.127,-32.166 -69.933,-28.36 -70.928,-28.36 -71.079,-28.209 -72.182,-28.209 IC1.9@-73.658,-26.734 ; -64.387,-32.23 -62.482,-32.23 C3.2 -60.467,-32.243 -55.09,-37.62 ; C2.2 -54.214,-25.219 -53.989,-25.444 -53.914,-25.444 -53.338,-26.02 -53.338,-34.034 -55.09,-35.786 -55.09,-37.62 ; IC5.5 -32.51,-22.604 -32.325,-22.789 -32.325,-24.197 -32.637,-24.509 -38.049,-24.509 -38.281,-24.74 -38.281,-27.902 -38.531,-28.152 R14.1 -36.36,-28.152 -34.979,-29.533 IC7.3 ; IC4.41 IC4.46 ; IC4.44 IC4.45 IC4.46 ; J2.5 -23.048,-42.215 -22.483,-41.65 -20.702,-41.65 -20.696,-41.656 -16.739,-41.656 -15.723,-40.64 -10.846,-40.64 ; R12.1 -22.101,-26.411 -22.101,-27.111 -19.243,-29.97 -15.619,-29.97 -13.714,-28.065 -13.714,-17.037 -14.74,-16.01 ; C14.2 -15.426,-15.325 -14.74,-16.01 ; C13.1 -13.126,-59.006 -11.682,-60.45 -11.682,-65.599 -12.213,-66.13 C12.2 -15.452,-66.218 IC4.1 -23.645,-66.218 -28.086,-61.777 IC4.43 IC4.42 IC4.49 ; P4.1 -14.353,-7.491 -13.462,-8.382 -13.462,-14.732 -14.74,-16.01 ; PANTALLA1.1 -5.969,-40.64 -10.846,-40.64 ; -55.09,-37.62 C9.2 -54.328,-39.622 -50.772,-43.178 J1.2 ; J1.2 -48.512,-44.194 -48.512,-47.496 -50.798,-49.782 -53.537,-49.782 C11.1 -53.592,-53.261 -51.687,-55.166 P2.3 -49.983,-66.218 IC4.40 -37.206,-66.218 IC4.49 ; J1.2 -36.128,-43.178 -35.493,-42.543 R2.1 -34.161,-41.908 -33.147,-40.894 -33.147,-39.243 -31.24,-37.336 -14.15,-37.336 -10.846,-40.64 ; IC4.49 IC4.48 -30.909,-58.474 -30.909,-57.121 IC4.47 IC4.46
  Bottom Layer w0.3: J3.1 -73.799,-5.332 -73.772,-5.332 -73.315,-4.874 -67.304,-4.874 J3.3 ; P1.3 -65.25,-62.456 -53.744,-62.456 P2.3 ; VR2.3 -17.571,-5.412 P4.1
IO0: IC4.27 J2.4 | length 30.8
  Top Layer w0.3: IC4.27 -41.474,-49.708 -41.908,-49.274 -41.908,-47.242 -41.019,-46.353 -34.923,-46.353 -34.161,-45.591 -34.161,-43.352 -32.832,-42.024 -30.526,-42.024 -30.351,-41.848 -30.351,-39.114 -29.589,-38.352 -24.89,-38.352 -24.382,-38.86 J2.4
NetC4_1: C4.1 IC1.7 | length 15.3
  Top Layer w0.3: IC1.7 -70.906,-25.842 -68.641,-25.842 v1(-68.578,-25.906) ; v1(-67.816,-35.177) -67.685,-35.046 -66.731,-35.046 -65.478,-33.793 C4.1
  Bottom Layer w0.3: v1(-68.578,-25.906) -67.42,-27.064 -67.42,-34.518 -67.816,-34.914 v1@-67.816,-35.166
NetC5_1: C5.1 IC1.4 R4.2 | length 11.3
  Top Layer w0.3: C5.1 -81.304,-32.002 -82.548,-32.002 -83.056,-31.494 R4.2 -82.994,-29.716 -80.008,-29.716 -78.611,-28.319 IC1.4
NetC6_1: C6.1 R4.1 | length 9.5
  Top Layer w0.3: R4.1 -82.994,-28.192 v1(-81.024,-28.192) ; C6.1 -82.922,-22.978 -80.776,-22.978 v1(-80.77,-22.985)
  Bottom Layer w0.3: v1(-81.024,-28.192) -80.838,-28.006 -80.838,-23.053 v1(-80.77,-22.985)
NetC10_1: C10.1 IC3.2 | length 6.6
  Top Layer w0.3: C10.1 -70.538,-43.432 -67.816,-43.432 -66.292,-44.956 IC3.2
NetC10_2: C10.2 IC3.4 | length 6.1
  Top Layer w0.3: C10.2 -70.174,-47.496 IC3.4
NetD1_2: D1.2 J1.1 | length 3.7
  Top Layer w0.3: D1.2@-48.232,-21.461 -48.232,-21.511 -47.822,-21.921 -47.794,-21.921 -47.496,-22.219 -47.496,-23.147 J1.1
NetD2_2: D2.2 IC1.8 L1.2 | length 18.9
  Top Layer w0.3: IC1.8 -67.719,-24.509 -66.535,-25.693 -66.535,-26.069 -65.26,-27.344 L1.2 -63.412,-27.557 -55.374,-27.557 -54.989,-27.942 D2.2
NetIC1_6: IC1.6 R3.1 R5.2 | length 17.3
  Top Layer w0.3: R5.2 R3.1 -71.626,-33.207 v1(-71.626,-34.923) ; IC1.6 -69.602,-27.049 -68.967,-27.684 v1(-68.705,-27.684)
  Bottom Layer w0.3: v1(-71.626,-34.923) -69.379,-34.923 -68.705,-34.248 v1(-68.705,-27.684)
NetIC5_1: IC5.1 P3.1 VR1.2 VR1.3 | length 27.9
  Top Layer w0.3: IC5.1 -41.259,-18.794 -41.781,-18.272 -41.781,-9.142 -40.551,-7.912 VR1.2 VR1.3 -31.414,-5.412 -30.351,-6.475 P3.1
NetIC5_8: IC5.8 P3.2 VR1.1 | length 19.1
  Top Layer w0.3: IC5.8 -32.637,-18.794 -32.002,-18.159 -32.002,-16.254 -36.574,-11.682 VR1.1 -34.923,-12.063 P3.2
NetIC6_5: IC6.5 R12.2 | length 7.4
  Top Layer w0.3: IC6.5 -21.509,-21.293 -21.176,-21.626 -21.176,-25.937 R12.2 R12.2@-20.637,-26.098
NetIC6_6: IC6.6 R9.1 R13.2 | length 11.6
  Top Layer w0.25: IC6.6 -23.269,-20.699 -20.953,-20.699
  Top Layer w0.3: -20.953,-20.793 -20.285,-21.461 R9.1 -17.016,-26.095 R13.2
NetIC7_1: IC7.1 IC7.2 | length 4.2
  Top Layer w0.3: IC7.2 -34.62,-28.883 -34.796,-28.707 -34.796,-28.367 -34.62,-28.192 -32.973,-28.192 IC7.1
NetIC7_5: IC7.5 R14.2 | length 16.6
  Top Layer w0.3: R14.2 -38.606,-31.113 -37.717,-32.002 -27.303,-32.002 -26.922,-31.621 -26.922,-30.605 -27.344,-30.183 IC7.5
NetIC7_6: IC7.6 R8.1 R10.2 R11.2 | length 21.4
  Top Layer w0.3: R10.2 -28.526,-35.217 -28.261,-34.952 -28.261,-34.49 -26.283,-32.512 ; IC7.6 -26.597,-29.533 -25.652,-30.478 -25.652,-31.881 -26.283,-32.512 ; R8.1 -25.233,-32.512 -26.283,-32.512
NetJ1_3: J1.3 J1.4 | length 18.3
  Top Layer w0.3: J1.3 J1.4
RXD0: IC4.36 J2.3 | length 45.3
  Top Layer w0.3: IC4.36 -42.363,-61.138 -43.305,-60.196 -43.305,-58.799 -44.009,-58.095 -45.35,-58.095 -47.242,-56.203 -47.242,-48.893 -43.559,-45.21 v1(-36.193,-45.21) ; v1(-30.478,-44.194) -30.255,-44.194 -29.493,-44.956 -24.763,-44.956 -24.382,-44.575 J2.3
  Bottom Layer w0.3: v1(-36.193,-45.21) -35.177,-44.194 v1(-30.478,-44.194)
SCLK: IC4.17 P1.2 P2.2 PANTALLA1.3 R7.2 | length 107.1
  Top Layer w0.3: P1.2 -69.975,-66.165 -69.721,-66.419 -54.402,-66.419 -54.227,-66.243 v1(-54.227,-59.053) ; v1(-50.544,-59.053) -50.48,-59.116 -45.019,-59.116 v1(-44.956,-59.18) ; v1(-26.668,-51.052) -26.668,-48.585 IC4.17 -26.541,-46.655 -26.365,-46.48 v1(-16.762,-46.48) ; R7.2@-14.745,-42.147 R7.2 -14.824,-42.291 -11.938,-42.291 -10.795,-43.434 v1(-10.795,-46.482)
  Bottom Layer w0.3: v1(-54.227,-59.053) v1(-50.544,-59.053) ; v1(-44.956,-59.18) -44.829,-59.307 -34.288,-59.307 -32.637,-57.656 -32.637,-55.037 -32.461,-54.862 -27.938,-54.862 -26.668,-53.592 v1(-26.668,-51.052) ; v1(-16.762,-46.48) v1(-16.762,-46.48) -10.796,-46.481 v1(-10.795,-46.482) -3.226,-46.482 -3.048,-46.304 -3.048,-37.338 -4.849,-35.537 -5.733,-35.537 PANTALLA1.3
SDA: IC4.12 P1.1 P2.1 PANTALLA1.4 R6.2 | length 107.3
  Top Layer w0.3: P2.1 -56.767,-57.031 -56.005,-56.269 v1(-56.005,-56.259) ; v1(-45.66,-56.251) -45.592,-56.318 -43.118,-56.318 v1(-43.051,-56.386) ; v1(-31.748,-52.195) -22.289,-52.195 IC4.12 ; IC4.12@-22.162,-52.322 IC4.12 ; R6.2 -16.127,-51.687 -16.688,-52.248 ; v1(-14.984,-52.195) -15.037,-52.248 -16.688,-52.248 ; v1(-5.969,-52.197) -3.556,-52.197 -2.86,-51.501 -2.86,-51.494 -2.54,-51.174 -2.54,-34.925 -4.574,-32.891 PANTALLA1.4 ; IC4.12 -16.688,-52.248
  Bottom Layer w0.3: P1.1 -69.213,-67.943 -57.529,-67.943 -56.767,-67.181 P2.1 ; v1(-56.005,-56.259) -56.001,-56.255 -45.664,-56.255 v1(-45.66,-56.251) ; v1(-43.051,-56.386) -36.193,-56.386 -32.002,-52.195 v1(-31.748,-52.195) ; v1(-14.984,-52.195) v1(-14.984,-52.195) -5.97,-52.196 v1(-5.969,-52.197)
Sign+: IC5.3 J3.4 | length 37
  Top Layer w0.3: J3.4 -60.323,-5.205 -59.815,-4.697 -45.337,-4.697 -43.305,-6.729 -43.305,-19.683 -41.654,-21.334 IC5.3
Sign-: IC5.2 J3.2 | length 48
  Top Layer w0.3: J3.2 -70.358,-6.82 -70.358,-4.826 -69.088,-3.556 -44.875,-3.556 -42.543,-5.888 -42.543,-19.302 -41.781,-20.064 IC5.2
TXD0: IC4.37 J2.2 | length 45.9
  Top Layer w0.3: v1(-44.194,-62.355) -39.789,-62.355 IC4.37 ; v1(-28.827,-41.527) -28.827,-40.352 -27.842,-39.368 -26.414,-39.368 -25.652,-40.13 J2.2
  Bottom Layer w0.3: v1(-44.194,-62.355) -46.099,-60.45 -46.099,-58.224 -45.59,-57.715 -44.575,-56.7 v1(-44.575,-51.687) -44.575,-49.782 -41.088,-46.295 -29.647,-46.295 -28.752,-45.4 -28.752,-41.601 v1(-28.827,-41.527)
V1: IC6.1 IC6.2 R10.1 | length 45.2
  Top Layer w0.3: R10.1 -38.435,-33.823 -34.839,-33.823 v1(-34.796,-33.78) ; IC6.2 -28.875,-19.993 -29.141,-19.726 -29.141,-19.477 ; IC6.1 -27.766,-19.302 -28.966,-19.302 -29.141,-19.477 ; v1(-25.525,-23.62) -25.525,-25.006 -21.08,-29.451 -21.08,-32.621 -22.35,-33.891 v1(-22.35,-33.907) ; v1(-24.382,-17.524) -24.509,-17.651 -28.827,-17.651 -29.141,-17.965 -29.141,-19.477
  Bottom Layer w0.3: v1(-34.796,-33.78) -34.732,-33.843 -22.413,-33.843 v1(-22.35,-33.907) ; v1(-25.525,-23.62) -25.525,-18.667 v1(-24.382,-17.524)
V2: IC6.7 R9.2 R11.1 | length 46.1
  Top Layer w0.3: R11.1 -13.206,-35.177 -12.571,-34.542 v1(-12.571,-16.762) ; IC6.7 -17.084,-19.993 R9.2 -16.966,-20.061 -16.616,-19.711 -16.616,-19.661 -16,-19.045 v1(-16,-16.762)
  Bottom Layer w0.3: v1(-16,-16.762) v1(-12.571,-16.762)
V_offset: C14.1 IC6.3 P4.2 VR2.2 | length 39.7
  Top Layer w0.3: IC6.3 -29.391,-20.643 -29.535,-20.498 -29.97,-20.064 -29.97,-15.863 -29.794,-15.688 -21.705,-15.688 -20.064,-14.046 ; VR2.2 -19.262,-7.912 -17.905,-9.269 -16.427,-9.269 P4.2@-15.665,-10.031 ; C14.1 -19.888,-16.675 -20.064,-16.499 -20.064,-14.046 ; P4.2 P4.2@-15.665,-10.031 ; -20.064,-14.046 -20.064,-10.793 -19.302,-10.031 P4.2@-15.665,-10.031
Vout_celda: IC4.6 IC7.7 R8.2 | length 41.8
  Top Layer w0.3: IC7.7 -24.834,-28.883 -24.382,-29.335 R8.2 -24.298,-30.394 -22.687,-30.394 v1(-22.604,-30.478) ; IC4.6 -22.183,-59.815 v1(-19.302,-59.815)
  Bottom Layer w0.3: v1(-22.604,-30.478) -21.715,-31.367 -20.112,-31.367 -19.302,-32.177 v1(-19.302,-59.815)
pads on no net: IC3.1 IC3.6 IC3.7 IC4.4 IC4.5 IC4.7 IC4.8 IC4.9 IC4.10 IC4.11 IC4.13 IC4.14 IC4.15 IC4.16 IC4.18 IC4.20 IC4.21 IC4.22 IC4.23 IC4.24 IC4.25 IC4.26 IC4.28 IC4.29 IC4.30 IC4.31 IC4.32 IC4.33 IC4.34 IC4.35 IC4.38 IC4.39 J1.MH1 J2.7 J2.8 J2.9
copper on no net: | length 1.7
  Top Layer w0.254: -79.627,-32.129 -78.896,-32.129
  Top Layer w0.3: -78.896,-32.129 -78.198,-32.827
  other v2: -82.287,-61.586 -7.5,-61.586 -82.287,-7.5 -7.5,-7.5

## Polygon pours and split planes (outlines as drawn)
GND on Top Layer "GND_L01_P000" (solid, pour order 0): -89.787,-56.386 ccw(c-77.087,-56.386) -77.087,-69.086 -12.698,-69.086 ccw(c-12.698,-56.386) 0.002,-56.386 0,-56.383 0,-12.7 0.002,-12.698 ccw(c-12.698,-12.698) -12.698,0.002 -12.7,0 -76.948,0 ccw(c-76.948,-12.839) -89.787,-12.839
GND on Bottom Layer "GND_L02_P001" (solid, pour order 1): -89.787,-56.386 ccw(c-77.087,-56.386) -77.087,-69.086 -12.698,-69.086 ccw(c-12.698,-56.386) 0.002,-56.386 0,-56.383 0,-12.7 0.002,-12.698 ccw(c-12.698,-12.698) -12.698,0.002 -12.7,0 -76.948,0 ccw(c-76.948,-12.839) -89.787,-12.839

## Silkscreen, mask and mechanical layers (free items; w line width, h text height)
Top Overlay:
  drawing of 51 lines, arcs and shapes, not listed
  text "Sign-" at -72.644,-12.908 h0.9
  text "Sign+" at -62.484,-12.908 h0.9
  text "SHIELD" at -78.613,-12.954 h0.9
  text "GND" at -66.802,-12.954 h0.9
  text "+12V" at -57.023,-12.954 h0.9
  text "Sergio A Marin P" at -3.288,-28.829 h1.1 r90
  text "Enrique Estupinan" at -6.269,-28.956 h0.9 r90
  text "SDA" at -2.284,-33.653 h0.6 r90
  text "SCK" at -2.411,-36.066 h0.6 r90
  text "3.3V" at -2.284,-39.114 h0.7 r90
  text "GND" at -2.411,-41.527 h0.7 r90
  text "SCK" at -54.989,-62.482 h0.6
  text "3.3V" at -49.401,-62.482 h0.6
  text "SDA" at -57.529,-62.609 h0.6
  text "GND" at -52.068,-62.609 h0.7
  text "SDA" at -72.896,-62.863 h0.7 r90
  text "SCK" at -70.356,-62.863 h0.7 r90
  text "GND" at -67.816,-62.863 h0.7 r90
  text "3.3V" at -65.022,-62.99 h0.7 r90
Mechanical 1:
  lines w0.254: -12.7,0 -76.948,0 ccw(c-76.948,-12.839) -89.787,-12.839 -89.787,-56.386 ccw(c-77.087,-56.386) -77.087,-69.086 -12.698,-69.086 ccw(c-12.698,-56.386) 0.002,-56.386 ; -12.698,0.002 cw(c-12.698,-12.698) 0.002,-12.698 ; 0,-56.383 0,-43.683 0,-12.7